# Altium PCB 指纹锁pcb图.PcbDoc
Units mil, origin at the board's own origin, x right, y up, seen from the top; angles counter-clockwise.
Board outline 3860 x 5845 mil, 2 copper layers (Top Layer, Bottom Layer); 33 components, 42 nets, 155 pads, 7 vias.
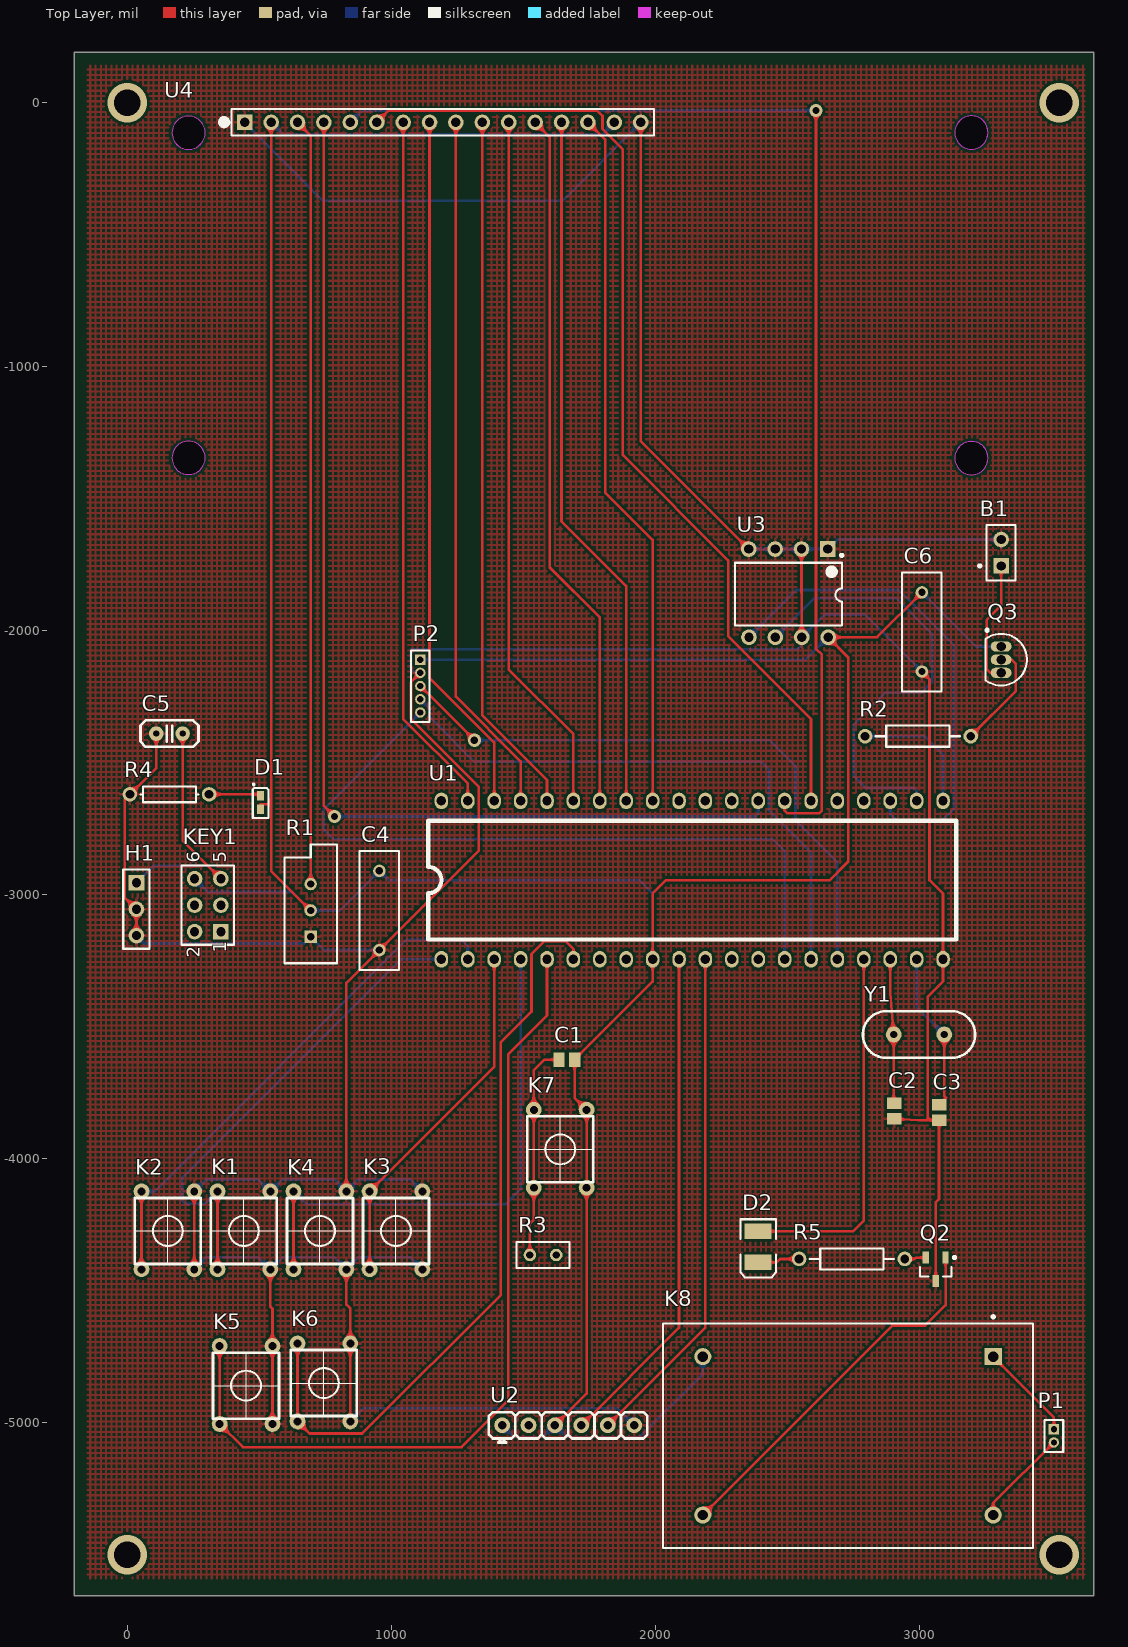
[diagram p0: Top Layer view]
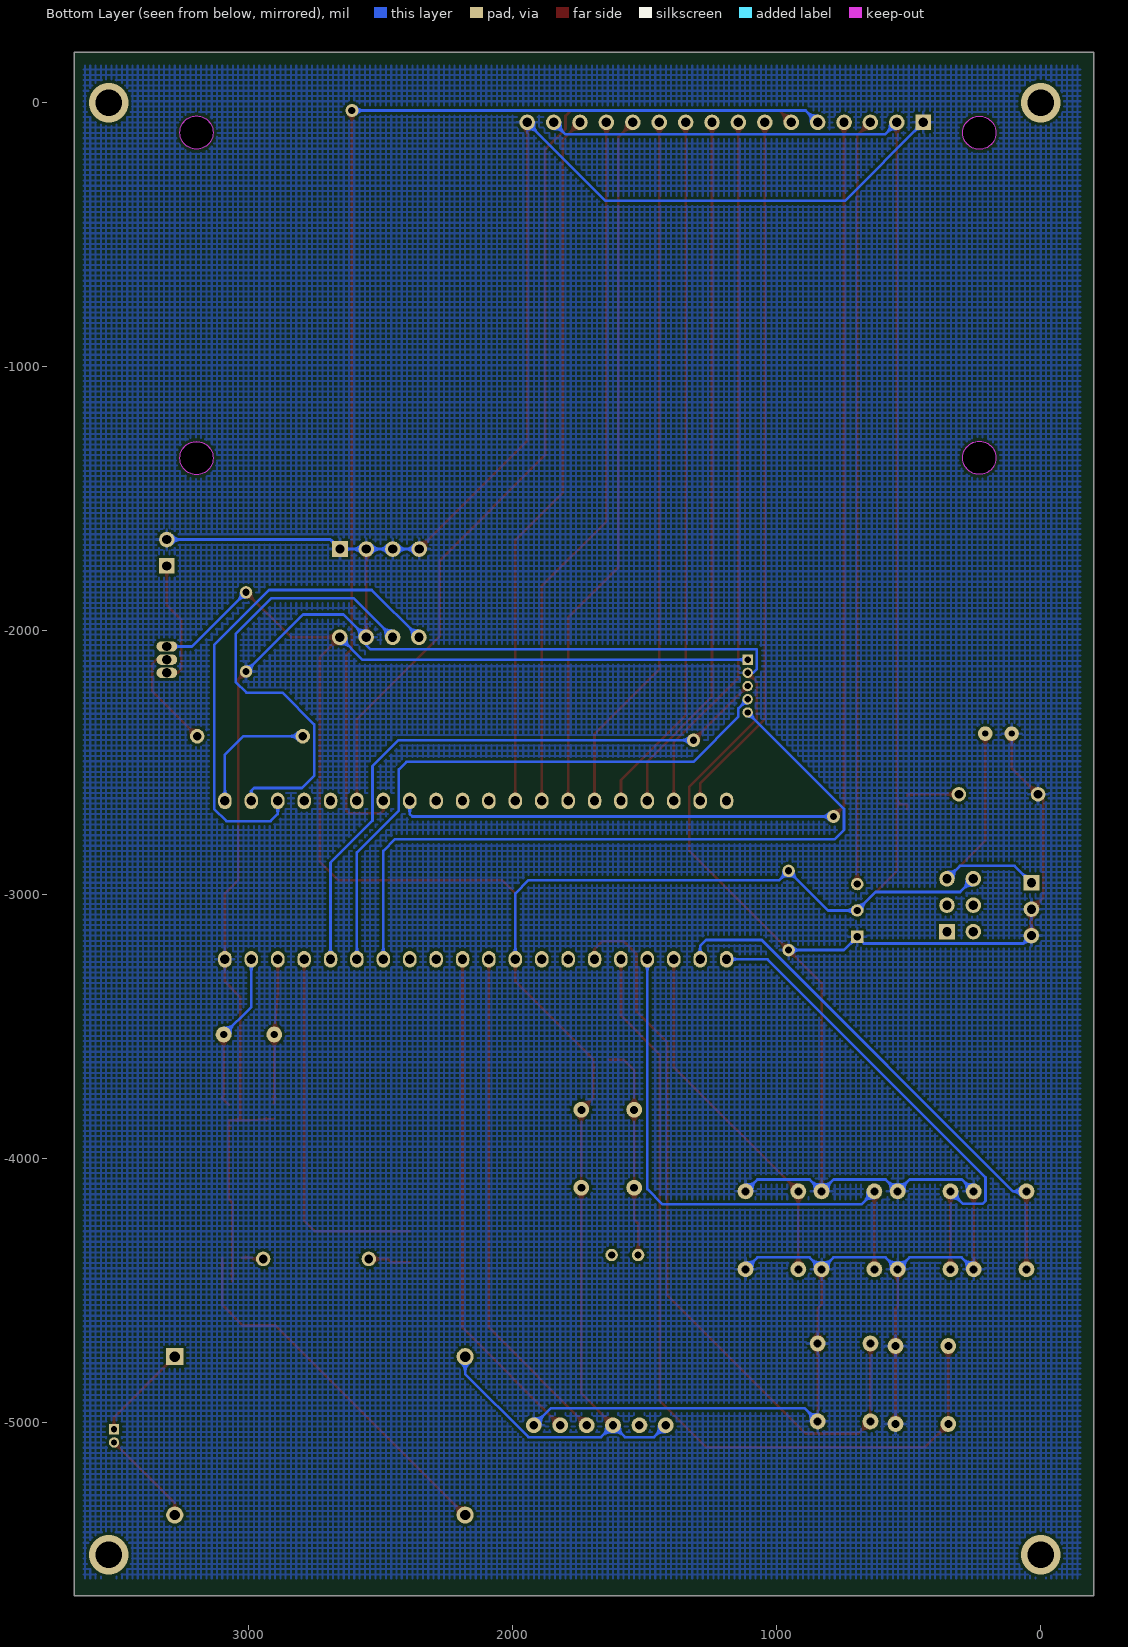
[diagram p1: Bottom Layer view, seen from below]

## Layer stack, top to bottom
Top Solder: solder mask 0.4, Solder Resist, Dk 3.5
Top Layer: signal copper 1.4
Dielectric 1: dielectric 12.6, FR-4, Dk 4.8
Bottom Layer: signal copper 1.4
Bottom Solder: solder mask 0.4, Solder Resist, Dk 3.5

## Board outline
-200,190 3660,190 3660,-5655 -200,-5655

## Design rules (kind name [scope] priority, off if disabled: settings)
Clearance [All] p1: gap=10 ignorepadtopadclearanceinfootprint=FALSE
PolygonConnect [All] p1: connectstyle=Relief reliefconductorwidth=10 reliefentries=4 polygonreliefangle="90 Angle" airgapwidth=10
RoutingVias [All] p1: holewidth=28 width=50 viastyle="Through Hole" minholewidth=28 minwidth=50 maxholewidth=28 maxwidth=50
SolderMaskExpansion [All] p1: expansion=4
Width [All] p1: maxlimit=10 minlimit=10 preferedwidth=10
30 further rules are at their usual default settings.

## Components (designator, comment, footprint, x,y, rotation, side; value= is the part's Value field where it differs from the comment)
B1 "Bell" PIN2 3310,-1755 r90 top
C1 "10uf" C0805 1665,-3625 r0 top
C2 "30pf" C0805 2905,-3819.53 r270 top
C3 "30pf" C0805 3075,-3825.47 r270 top
C4 "Cap" RAD-0.3 955,-3060 r90 top value=0.1uf/50v
C5 "Cap Pol2" Capacitor-Disk-Middle 210,-2390 r180 top value=220uF/16V
C6 "Cap" RAD-0.3 3010,-2005 r270 top value=100pF
D1 "LED Chip" CLED1005-0402 505,-2650.59 r90 top
D2 "LED3" 3.5X2.8X1.9 2390,-4334.06 r270 top
H1 "Component_1" HDR1X3 35,-2955 r270 top
K1 "Button" BUTTON-DIP 342,-4124 r270 top
K2 "Button" BUTTON-DIP 54,-4124 r270 top
K3 "Button" BUTTON-DIP 918,-4124 r270 top
K4 "Button" BUTTON-DIP 630,-4124 r270 top
K5 "Button" BUTTON-DIP 350,-4709.72 r270 top
K6 "Button" BUTTON-DIP 645,-4700 r270 top
K7 "Button" BUTTON-DIP 1540,-3815 r270 top
K8 "SDR-5v" MODULE4 2730,-5050 r180 top
KEY1 "Component_1" HDR2X3 355,-3140 r90 top
P1 "" MHDR1X2 3510,-5025 r270 top
P2 "DS1302" MHDR1X5 1110,-2110 r270 top
Q2 "8050" SOT-23B_N 3062.4,-4419.29 r270 top
Q3 "9012" TO-92A 3310,-2110 r180 top
R1 "RPot" VR5 695,-3060 r90 top value=10K
R2 "" AXIAL-0.4 2995,-2400 r0 top value=1K
R3 "10K" RAD-0.1 1575,-4365 r180 top
R4 "Res1" AXIAL-0.3 160,-2620 r0 top value=510/0.125w
R5 "Res2" AXIAL-0.4 2745,-4380 r0 top value=3K
U1 "89C51/C52" DIP-40 1190,-3245 r0 top
U2 "AS608" SIP-6 1670,-5010 r0 top
U3 "AT24C02" DIP8 2505,-1865 r270 top
U4 "LCD1602" LCD1602 1195,-75 r180 top
Y1 "11.0592MHz" XTAL-49/U_N 2903,-3530 r0 top

## Footprints (in the part's own frame and the unit in brackets; to place one, negate y for a bottom-side part, rotate by r counter-clockwise, add the part's x,y. Pads: shape width x height; smd on the part's side, far side on the other; paste and mask are expansions set on the pad)
3.5X2.8X1.9 [mm] "SM LED; 2 C-Bend Leads; Body 3.5 x 2.8 x 1.9 mm, inc leads (LxWxH typ)"
  rect 1.5x2.6 smd: 1(-1.5,0) 2(1.5,0)
  silkscreen extent -2.65,-1.7 2.95,1.7
AXIAL-0.3 [mm] "Axial Device, Thru-Hole; 2 Leads; 0.3 in Pin Spacing"
  round 1.4 hole 0.85: 1(-3.81,0) 2(3.81,0)
  silkscreen extent -2.77,-0.76 2.77,0.76
AXIAL-0.4 [mm] "Axial Device, Thru-Hole; 2 Leads; 0.4 in Pin Spacing"
  round 1.4 hole 0.85: 1(-5.08,0) 2(5.08,0)
  silkscreen extent -4.06,-1.02 4.06,1.02
BUTTON-DIP [mil]
  round 60 hole 30: 1(0,0) 1(295.28,0) 2(0,200) 2(295.28,200)
  silkscreen extent 25,-25 275,225, body extent -29,-30 325,230, height 181
C0805 [mm] "Chip Capacitor, Body 2.0x1.3mm, IPC High Density"
  rect 1.1x1.4 smd: 1(-0.75,0) 2(0.75,0)
  body extent -1.1,-0.72 1.1,0.72, height 1.4
Capacitor-Disk-Middle [mm]
  round 1.4 hole 0.6: 1(0,0) 2(2.54,0)
  silkscreen extent -1.52,-1.27 4.06,1.27, body extent -1.23,-1.1 3.77,1, height 7
CLED1005-0402 [mm]
  rect 0.9x0.7 smd: 1(-0.65,0) 2(0.65,0)
  silkscreen extent -1.5,-0.75 1.78,0.75, body extent -0.5,-0.25 0.5,0.25, height 0.4
DIP8 [mm]
  rect 1.5x1.5 hole 0.9: 1(-4.42,3.785)
  round 1.5 hole 0.9: 2(-4.42,1.245) 3(-4.42,-1.295) 4(-4.42,-3.835) 5(4.064,-3.81) 6(4.064,-1.27) 7(4.064,1.27) 8(4.064,3.81)
  silkscreen extent -3.93,-5.15 2.92,5.24, body extent -4.32,-4.95 4.06,4.95, height 3.65
DIP-40 [mm] "40脚直插芯片 间距2.54mm 600mil"
  oval 1.3x1.6 hole 0.9: 1(0,0) 2(2.54,0) 3(5.08,0) 4(7.62,0) 5(10.16,0) 6(12.7,0) 7(15.24,0) 8(17.78,0) 9(20.32,0) 10(22.86,0) 11(25.4,0) 12(27.94,0) 13(30.48,0) 14(33.02,0) 15(35.56,0) 16(38.1,0) 17(40.64,0) 18(43.18,0) 19(45.72,0) 20(48.26,0) 21(48.26,15.24) 22(45.72,15.24) 23(43.18,15.24) 24(40.64,15.24) 25(38.1,15.24) 26(35.56,15.24) 27(33.02,15.24) 28(30.48,15.24) 29(27.94,15.24) 30(25.4,15.24) 31(22.86,15.24) 32(20.32,15.24) 33(17.78,15.24) 34(15.24,15.24) 35(12.7,15.24) 36(10.16,15.24) 37(7.62,15.24) 38(5.08,15.24) 39(2.54,15.24) 40(0,15.24)
  silkscreen extent -1.27,1.91 49.53,13.33, body extent -1.22,-1.18 49.48,16.42, height 8.5
HDR1X3 [mm] "Connector; Header; 3 Position"
  rect 1.5x1.5 hole 0.9: 1(0,0)
  round 1.5 hole 0.9: 2(2.54,0) 3(5.08,0)
  silkscreen extent -1.27,-1.27 6.35,1.27
HDR2X3 [mm] "Connector; Header; 3x2 Position"
  rect 1.5x1.5 hole 0.9: 1(0,0)
  round 1.5 hole 0.9: 2(0,2.54) 3(2.54,0) 4(2.54,2.54) 5(5.08,0) 6(5.08,2.54)
  silkscreen extent -1.27,-1.27 6.35,3.81
LCD1602 [mm] "LCD1602"
  rect 1.5x1.5 hole 0.9: 1(19.05,0)
  round 1.5 hole 0.9: 2(16.51,0) 3(13.97,0) 4(11.43,0) 5(8.89,0) 6(6.35,0) 7(3.81,0) 8(1.27,0) 9(-1.27,0) 10(-3.81,0) 11(-6.35,0) 12(-8.89,0) 13(-11.43,0) 14(-13.97,0) 15(-16.51,0) 16(-19.05,0)
  Keep-Out Layer circle w0.1: c-50.867,32.3 r1.6
  Keep-Out Layer circle w0.1: c-50.867,0.974 r1.6
  Keep-Out Layer circle w0.1: c24.451,1 r1.6
  Keep-Out Layer circle w0.1: c24.451,32.274 r1.6
  Keep-Out Layer board cut-out: -52.467,32.3 -52.345,31.687 -51.998,31.168 -51.479,30.821 -50.867,30.7 -50.867,30.7 -50.255,30.821 -49.736,31.168 -49.389,31.687 -49.267,32.3 -49.267,32.3 -49.389,32.912 -49.736,33.431 -50.255,33.778 -50.867,33.9 -50.867,33.9 -51.479,33.778 -51.998,33.431 -52.345,32.912 -52.467,32.3
  Keep-Out Layer board cut-out: -52.467,0.974 -52.345,0.362 -51.998,-0.157 -51.479,-0.504 -50.867,-0.626 -50.867,-0.626 -50.255,-0.504 -49.736,-0.157 -49.389,0.362 -49.267,0.974 -49.267,0.974 -49.389,1.587 -49.736,2.106 -50.255,2.453 -50.867,2.574 -50.867,2.574 -51.479,2.453 -51.998,2.106 -52.345,1.587 -52.467,0.974
  Keep-Out Layer board cut-out: 22.851,1 22.973,0.388 23.32,-0.132 23.839,-0.478 24.451,-0.6 24.451,-0.6 25.063,-0.478 25.582,-0.132 25.929,0.388 26.051,1 26.051,1 25.929,1.612 25.582,2.131 25.063,2.478 24.451,2.6 24.451,2.6 23.839,2.478 23.32,2.131 22.973,1.612 22.851,1
  Keep-Out Layer board cut-out: 22.851,32.274 22.973,31.662 23.32,31.143 23.839,30.796 24.451,30.674 24.451,30.674 25.063,30.796 25.582,31.143 25.929,31.662 26.051,32.274 26.051,32.274 25.929,32.886 25.582,33.406 25.063,33.752 24.451,33.874 24.451,33.874 23.839,33.752 23.32,33.406 22.973,32.886 22.851,32.274
  silkscreen extent -20.32,-1.27 21.47,1.27, body extent -53.46,-1.61 27.04,34.89, height 10.52
MHDR1X2 [mm] "Connector; Header; 2 Position"
  rect 1x1 hole 0.6: 1(0,0)
  round 1 hole 0.6: 2(1.27,0)
  silkscreen extent -0.9,-0.9 2.17,0.9
MHDR1X5 [mm] "Connector; Header; 5 Position"
  rect 1x1 hole 0.6: 1(0,0)
  round 1 hole 0.6: 2(1.27,0) 3(2.54,0) 4(3.81,0) 5(5.08,0)
  silkscreen extent -0.9,-0.9 5.98,0.9
MODULE4 [mm] "DIP; 4 Round Pins; Row Space 27.94 mm; Pitch 15.24 mm"
  rect 1.65x1.65 hole 1: 1(-13.97,-7.62)
  round 1.65 hole 1: 2(-13.97,7.62) 3(13.97,-7.62) 4(13.97,7.62)
  silkscreen extent -17.8,-11.57 17.8,10.8, body extent -17.8,-10.8 17.8,10.8, height 14
PIN2 [mm] "Photosensitive Diode; 2 Leads"
  rect 1.5x1.5 hole 0.9: 1(0,0)
  round 1.5 hole 0.9: 2(2.54,0)
  silkscreen extent -1.4,-1.4 3.94,2.17
RAD-0.1 [mm] "Radial Cap, Thru-Hole; 2 Leads; 0.1 in Pin Spacing"
  round 1.2 hole 0.7: 1(-1.27,0) 2(1.27,0)
  silkscreen extent -2.54,-1.27 2.54,1.27
RAD-0.3 [mm] "Radial Cap, Thru-Hole; 2 Leads; 0.3 in Pin Spacing"
  round 1.2 hole 0.7: 1(-3.81,0) 2(3.81,0)
  silkscreen extent -5.71,-1.91 5.71,1.91
SIP-6 [mil]
  round 60 hole 32: 1(-250,0) 2(-150,0) 3(-50,0) 4(50,0) 5(150,0) 6(250,0)
  silkscreen extent -300,-65 300,50
SOT-23B_N [mm] "SOT23, 3-Leads, Body 2.9x1.3mm, Pitch 0.95mm, Lead Span 2.4mm, IPC Medium Density"
  rect 1.15x0.6 smd: 1(-1.125,0.95) 2(-1.125,-0.95) 3(1.125,0)
  silkscreen extent -1.25,-1.5 0.7,1.93, body extent -0.7,-1.5 0.7,1.5, height 1.14
TO-92A [mm] "TO, Flat Index; 3 In-Line, Axial Leads; Body Dia. 4.5mm; Leads 0.51 x 0.48 mm (max)"
  oval 2x1 hole 0.9: 1(0,-1.27) 2(0,0) 3(0,1.27)
  silkscreen extent -2.48,-2.95 1.5,2.48, body extent -2.48,-2.5 1.5,2.5, height 6.86
VR5 [mm] "Thru-Hole; 3 Leads"
  rect 1.2x1.2 hole 0.7: 1(-2.54,0)
  round 1.2 hole 0.7: 2(0,0) 3(2.54,0)
  silkscreen extent -5.08,-2.54 6.35,2.54
XTAL-49/U_N [mil] "高型晶振（未加焊）"
  round 60 hole 28: 1(0,0) 2(192,0)
  silkscreen extent -116,-88 308,88, body extent -117,-88 309,89, height 512

## Part data
B1: "Electrical Bell", LatestRevisionDate=17-Jul-2002, LatestRevisionNote="Re-released for DXP Platform.", PackageReference=PIN2, Published=24-Mar-1999, Publisher="Altium Limited"
C1: library part 电解电容, "Capacitor"
C2 C3: library part CAP, "Capacitor"
C4 C6: "Capacitor", LatestRevisionDate=17-Jul-2002, LatestRevisionNote="Re-released for DXP Platform.", PackageDescription="Radial Cap, Thru-Hole; 2 Leads; 0.3 in Pin Spacing", PackageReference=RAD-0.3, Published=8-Jun-2000, Publisher="Altium Limited"
C5: "Polarized Capacitor (Axial)", LatestRevisionDate=17-Jul-2002, LatestRevisionNote="Re-released for DXP Platform.", PackageDescription="Polarized Capacitor; 2 Leads", PackageReference=POLAR0.8, Published=8-Jun-2000, Publisher="Altium Limited"
D1: "Typical Chip LED", Published=8-Jun-2000, Publisher="Altium Limited", Revision="July-2002: Re-released for DXP Platform."
D2: "Typical BLUE SiC LED", DatasheetVersion=16-Apr-2002, LatestRevisionDate=17-Dec-2003, LatestRevisionNote="PCB Footprint replaced.", PackageDescription="SM LED; 2 C-Bend Leads; Body 3.5 x 2.8 x 1.9 mm, inc leads (LxWxH typ)", PackageReference=3.5X2.8X1.9, PackageVersion=16-Apr-2002, Published=8-Jun-2000, Publisher="Altium Limited"
K8: library part Relay-SPST, "Single-Pole Single-Throw Relay", LatestRevisionDate=17-Jul-2002, LatestRevisionNote="Re-released for DXP Platform.", PackageReference=MODULE4, Published=24-Mar-1999, Publisher="Altium Limited"
P1: library part MHDR1X2, "Header, 2-Pin", LatestRevisionDate=17-Jul-2002, LatestRevisionNote="Re-released for DXP Platform.", Publisher="Altium Limited"
P2: library part MHDR1X5, "Header, 5-Pin", LatestRevisionDate=17-Jul-2002, LatestRevisionNote="Re-released for DXP Platform.", Publisher="Altium Limited"
Q2: library part QNPN, "NPN Bipolar Transistor", LatestRevisionDate=29-May-2009, LatestRevisionNote="IPC-7351 Footprint Added.", PackageDescription="3-Pin SOT-23 Package 0.95 mm Pitch, 2.4 mm Lead Span", PackageReference=SOT-23B, PackageVersion=Aug-1999, Published=8-Jun-2000, Publisher="Altium Limited"
Q3: library part 2N3906, "PNP General Purpose Amplifier", ComponentLink1Description="Manufacturer Link", ComponentLink1URL=http://www.fairchildsemi.com/, ComponentLink2Description=Datasheet, ComponentLink2URL=http://www.fairchildsemi.com/ds/2N%2F2N3906.pdf, DatasheetVersion=1997, LatestRevisionDate=15-Jan-2003, LatestRevisionNote="PCB Footprint 'BCY-W3/D4.7' replaced", PackageDescription="TO, Flat Index; 3 In-Line, Axial Leads; Body Dia. 4.5mm; Leads 0.51 x 0.48 mm (max)", PackageReference=TO-92A, PackageVersion=Sep-1998, Published=8-Jun-2000, Publisher="Altium Limited"
R1: "Potentiometer", LatestRevisionDate=17-Jul-2002, LatestRevisionNote="Re-released for DXP Platform.", PackageDescription="Variable Resistor, Thru-Hole; 3 Leads", PackageReference=VR5, Published=8-Jun-2000, Publisher="Altium Limited", Set Position=0.5, Sim Note="Enter the Resistance value and the set point into parameter fields."
R2: library part Res2, "Resistor", LatestRevisionDate=17-Jul-2002, LatestRevisionNote="Re-released for DXP Platform.", PackageDescription="Axial Device, Thru-Hole; 2 Leads; 0.4 in Pin Spacing", PackageReference=AXIAL-0.4, Published=8-Jun-2000, Publisher="Altium Limited"
R3: library part RES2
R4 R5: "Resistor", LatestRevisionDate=17-Jul-2002, LatestRevisionNote="Re-released for DXP Platform.", Published=8-Jun-2000, Publisher="Altium Limited"
  R4: PackageDescription="Axial Device, Thru-Hole; 2 Leads; 0.3 in Pin Spacing", PackageReference=AXIAL-0.3
  R5: PackageDescription="Axial Device, Thru-Hole; 2 Leads; 0.4 in Pin Spacing", PackageReference=AXIAL-0.4
U1: library part AT89C51
U2: library part FM608
Y1: library part CRYSTAL, "Crystal"
K1 K2 K3 K4 K5 K6 K7: LatestRevisionDate=17-Jul-2002, LatestRevisionNote="Re-released for DXP Platform.", PackageReference=SPST-2, Published=24-Mar-1999, Publisher="Altium Limited"

## Via types
v1: diameter 150, hole 100, Top Layer to Bottom Layer, 4 vias
v2: diameter 50, hole 28, Top Layer to Bottom Layer, 3 vias

## Nets (pads, with @x,y where several pads share a name; then routed paths per layer and width w, separated by ;. In a path a pad name is that pad's centre, name@x,y a point inside that pad or via, vN(x,y) a via of type N, cw(c..) or ccw(c..) an arc to the next point about the centre after c; other vN are vias at no path point)
GND: B1.2 C2.2 C3.2 C4.1 C5.2 C6.2 H1.2 H1.3 K1.2 K2.2 K3.2 K4.2 K5.2 K6.2 P2.2 Q2.3 R1.1 R4.1 U1.20 U2.6 U3.1 U3.2 U3.3 U3.4 U3.7 U4.1 U4.16 | length 18225.1
  Top Layer w10: H1.3 H1.2 -10,-3010 -10,-2640 R4.1 110,-2520 C5.2 ; K2.2@254,-4419.28 K2.2@254,-4124 ; K1.2@542,-4419.28 542,-4561 550,-4569 550,-4709.72 K5.2@550,-5005 ; K4.2@830,-4419.28 830,-4553 845,-4568 845,-4700 K6.2@845,-4995.28 ; K4.2@830,-4124 830,-3335 C4.1 1331,-2834 1331,-2591 1075,-2335 1075,-2195 P2.2 ; U4.16 1945,-1282 U3.4 ; U3.2 2554,-1857 2555,-1858 U3.7 ; C2.2 2995.94,-3855 3042,-3855 ; C6.2 3039,-2184 3039,-2945 3090,-2996 U1.20 3090,-3329 3032,-3387 3032,-3845 3042,-3855 ; Q2.3 3062.4,-4166 3075,-4153.4 C3.2 3042,-3855
  Bottom Layer w10: H1.3 65,-3185 670,-3185 R1.1 745,-3210 C4.1 ; K2.2@254,-4419.28 299.28,-4374 496.72,-4374 542,-4419.28 587.28,-4374 784.72,-4374 830,-4419.28 875.28,-4374 1072.72,-4374 K3.2@1118,-4419.28 ; K2.2@254,-4124 299,-4079 497,-4079 542,-4124 587,-4079 785,-4079 830,-4124 875,-4079 1073,-4079 K3.2@1118,-4124 ; U4.1 742,-372 1648,-372 U4.16 ; K6.2@845,-4995.28 895.28,-4945 1855,-4945 U2.6 ; P2.2 1090,-2160 1075,-2145 1075,-2070 2540,-2070 2555,-2055 U3.7 2641,-1939 2794,-1939 C6.2 ; U3.4 U3.3 U3.2 U3.1 2690,-1655 B1.2
LCDEN: U1.26 U4.6 | length 3804.2
  Top Layer w10: U4.6 990,-30 1780,-30 1800,-50 1800,-100 1877,-177 1877,-1335 2276,-1734 2276,-2021 2590,-2335 U1.26
NetB1_1: B1.1 Q3.3 | length 474
  Top Layer w10: Q3.3 3270,-2160 3255,-2145 3255,-1959 3310,-1904 B1.1
NetC1_1: C1.1 K7.1 R3.2 | length 818.3
  Top Layer w10: R3.2 1525,-4246 1540,-4231 1540,-4110.28 1540,-3815 1540,-3665 1580,-3625 C1.1
NetC2_1: C2.1 U1.18 Y1.1 | length 547.5
  Top Layer w10: U1.18 2890,-3374 Y1.1 2903,-3790 C2.1
NetC3_1: C3.1 U1.19 Y1.2 | length 607.8
  Top Layer w10: C3.1 3101.15,-3769.79 3095,-3763.64 Y1.2
  Bottom Layer w10: U1.19 2990,-3425 Y1.2
NetD1_2: D1.2 R4.2 | length 200
  Top Layer w10: R4.2 505,-2620 D1.2
NetD2_1: D2.1 U1.17 | length 1406.6
  Top Layer w10: D2.1 2750,-4275 2790,-4235 U1.17
NetD2_2: D2.2 R5.1 | length 160.4
  Top Layer w10: D2.2 2460,-4393.11 2473.11,-4380 R5.1
NetK1_1: K1.1 U1.1 | length 1864.7
  Top Layer w10: K1.1@342,-4419.28 K1.1@342,-4124
  Bottom Layer w10: K1.1@342,-4124 295,-4171 220,-4171 209,-4160 209,-4070.62 1034.62,-3245 U1.1
NetK2_1: K2.1 U1.2 | length 1985.1
  Top Layer w10: K2.1@54,-4419.28 K2.1@54,-4124
  Bottom Layer w10: K2.1@54,-4124 104.62,-4124 1056.62,-3172 1267,-3172 1290,-3195 U1.2
NetK3_1: K3.1 U1.3 | length 1369.8
  Top Layer w10: K3.1@918,-4419.28 918,-4124 1390,-3652 U1.3
NetK4_1: K4.1 U1.4 | length 2069.6
  Top Layer w10: K4.1@630,-4419.28 K4.1@630,-4124
  Bottom Layer w10: K4.1@630,-4124 679,-4173 1432,-4173 1490,-4115 U1.4
NetK5_1: K5.1 U1.5 | length 3230.5
  Top Layer w10: K5.1@350,-4709.72 350,-5005 438,-5093 1267,-5093 1443,-4917 1443,-3605 1590,-3458 U1.5
NetK6_1: K6.1 U1.6 | length 2871.4
  Top Layer w10: K6.1@645,-4700 645,-4995.28 690.72,-5041 890,-5041 1415,-4516 1415,-3559 1531,-3443 1531,-3225 1580,-3176 1660,-3176 1690,-3206 U1.6
NetK8_1: K8.1 P1.1 | length 370.3
  Top Layer w10: K8.1 3510,-4980 P1.1
NetK8_2: K8.2 P1.2 | length 370.3
  Top Layer w10: K8.2 3280,-5305 P1.2
NetK8_4: K8.4 Q2.1 | length 1429.1
  Top Layer w10: K8.4 2897.8,-4632.2 3022.61,-4632.2 3099.8,-4555 Q2.1
NetP2_3: P2.3 U1.16 | length 2344.4
  Top Layer w10: P2.3 v2(1315,-2415)
  Bottom Layer w10: v2(1315,-2415) 2433,-2415 2531,-2513 2531,-2720 2690,-2879 U1.16
NetP2_4: P2.4 U1.15 | length 2234.2
  Bottom Layer w10: P2.4 1145,-2295 1145,-2326 1316,-2497 2402,-2497 2431,-2526 2431,-2681 2590,-2840 U1.15
NetP2_5: P2.5 U1.14 | length 2784.3
  Bottom Layer w10: P2.5 745,-2675 745,-2755 780,-2790 2445,-2790 2490,-2835 U1.14
NetQ2_2: Q2.2 R5.2 | length 82.1
  Top Layer w10: R5.2 2982,-4380 2987,-4375 Q2.2
NetQ3_2: Q3.2 R2.2 | length 406.6
  Top Layer w10: R2.2 3365,-2230 3365,-2125 3350,-2110 Q3.2
NetR1_3: R1.3 U4.3 | length 2905.7
  Top Layer w10: U4.3 695,-125 R1.3
NetR2_1: R2.1 U1.21 | length 499
  Bottom Layer w10: R2.1 3020,-2400 3090,-2470 U1.21
NetU1_10: U1.10 U2.4 | length 1918.3
  Top Layer w10: U2.4 2090,-4640 U1.10
NetU1_11: U1.11 U2.5 | length 1918.3
  Top Layer w10: U2.5 2190,-4640 U1.11
NetU1_22: U1.22 U3.6 | length 1752.7
  Bottom Layer w10: U3.6 2603,-1877 2914,-1877 3049,-2012 3049,-2195 3009,-2235 2872,-2235 2752,-2355 2752,-2550 2798,-2596 2980,-2596 2990,-2606 U1.22
NetU1_23: U1.23 U3.5 | length 1879
  Bottom Layer w10: U3.5 2534,-1846 2923,-1846 3131,-2054 3131,-2675 3084,-2722 2917,-2722 2890,-2695 U1.23
P00: U1.39 U4.7 | length 2671.5
  Top Layer w10: U4.7 1045,-2334 1290,-2579 U1.39
P01: U1.38 U4.8 | length 2671.5
  Top Layer w10: U4.8 1145,-2179 1390,-2424 U1.38
P02: U1.37 U4.9 | length 2671.5
  Top Layer w10: U4.9 1245,-2250 1490,-2495 U1.37
P03: U1.36 U4.10 | length 2671.5
  Top Layer w10: U4.10 1345,-2321 1590,-2566 U1.36
P04: U1.35 U4.11 | length 2671.5
  Top Layer w10: U4.11 1445,-2147 1690,-2392 U1.35
P05: U1.34 U4.12 | length 2671.5
  Top Layer w10: U4.12 1600,-130 1600,-1760 1790,-1950 U1.34
P06: U1.33 U4.13 | length 2671.5
  Top Layer w10: U4.13 1645,-1586 1890,-1831 U1.33
P07: U1.32 U4.14 | length 2671.5
  Top Layer w10: U4.14 1810,-140 1810,-1477 1990,-1657 U1.32
P37: U2.2
RS: U1.28 U4.4 | length 4303.7
  Top Layer w10: U4.4 745,-2664 v2(785,-2704)
  Bottom Layer w10: v2(785,-2704) 2380,-2704 2390,-2694 U1.28
VCC: C1.2 C4.2 C6.1 D1.1 K7.2 K8.3 KEY1.6 P2.1 Q3.1 R1.2 U1.9 U2.1 U2.3 U3.8 U4.2 U4.15 | length 13829
  Top Layer w10: D1.1 505,-2658 532,-2658 545,-2645 ; U4.2 545,-2645 ; R1.2 545,-2910 545,-2645 ; U2.3 1740,-4890 1740,-4110.28 1740,-3815 1694.53,-3769.53 C1.2 1990,-3329.53 U1.9 1990,-2995 2040,-2945 2661,-2945 2731,-2875 2731,-2101 U3.8 2840,-2025 C6.1
  Bottom Layer w10: KEY1.6 305,-2990 625,-2990 R1.2 805,-3060 C4.2 990,-2945 1940,-2945 1990,-2995 U1.9 ; U4.2 590,-120 1800,-120 U4.15 ; P2.1 2570,-2110 U3.8 ; U2.1 1465,-5055 1575,-5055 U2.3 1665,-5055 1940,-5055 2180,-4815 K8.3 ; C6.1 3215,-2060 Q3.1
VDD: C5.1 H1.1 KEY1.5 | length 976.9
  Top Layer w10: C5.1 210,-2795 KEY1.5
  Bottom Layer w10: H1.1 99,-2891 306,-2891 KEY1.5
WR: U1.27 U4.5 | length 4629.5
  Top Layer w10: U1.27 2490,-2682 2500,-2692 2620,-2692 2631,-2681 2631,-2091 2609,-2069 v2(2609,-30)
  Bottom Layer w10: U4.5 890,-30 v2(2609,-30)
pads on no net: KEY1.1 KEY1.2 KEY1.3 KEY1.4 R3.1 U1.7 U1.8 U1.12 U1.13 U1.24 U1.25 U1.29 U1.30 U1.31 U1.40
copper on no net:
  other v1: 0,-5500 3530,-5500 0,0 3530,0

## Polygon pours and split planes (outlines as drawn)
GND on Bottom Layer "Bottom Layer-No Net" (hatched 90Degree grid 20 track 8, remove dead copper, pour order 6): -150,140 3625,140 3625,-5590 -150,-5590
GND on Top Layer "Bottom Layer-No Net" (hatched 90Degree grid 20 track 8, remove dead copper, pour order 4): -150,140 3625,140 3625,-5590 -150,-5590

## Keep-outs
Mechanical 1:
  lines w10: -150,-5590 3625,-5590 3625,140 -150,140 -150,-5590

## Silkscreen, mask and mechanical layers (free items; w line width, h text height)
Mechanical 1:
  the board outline again, w10

## Text inside footprints (layer, text, board x,y; h text height)
KEY1: Top Overlay "1" at 375,-3220 h50 r90; Top Overlay "2" at 275,-3240 h50 r90; Top Overlay "5" at 375,-2880 h50 r90; Top Overlay "6" at 275,-2880 h50 r90